# Altium PCB LED Controller.PcbDoc (part 1 of 2)
Units mm, origin at the board's own origin, x right, y up, seen from the top; angles counter-clockwise.
Board outline 41 x 37 mm, 2 copper layers (Top Layer, Bottom Layer), stack 1.62 mm thick; 53 components, 38 nets, 220 pads, 86 vias.
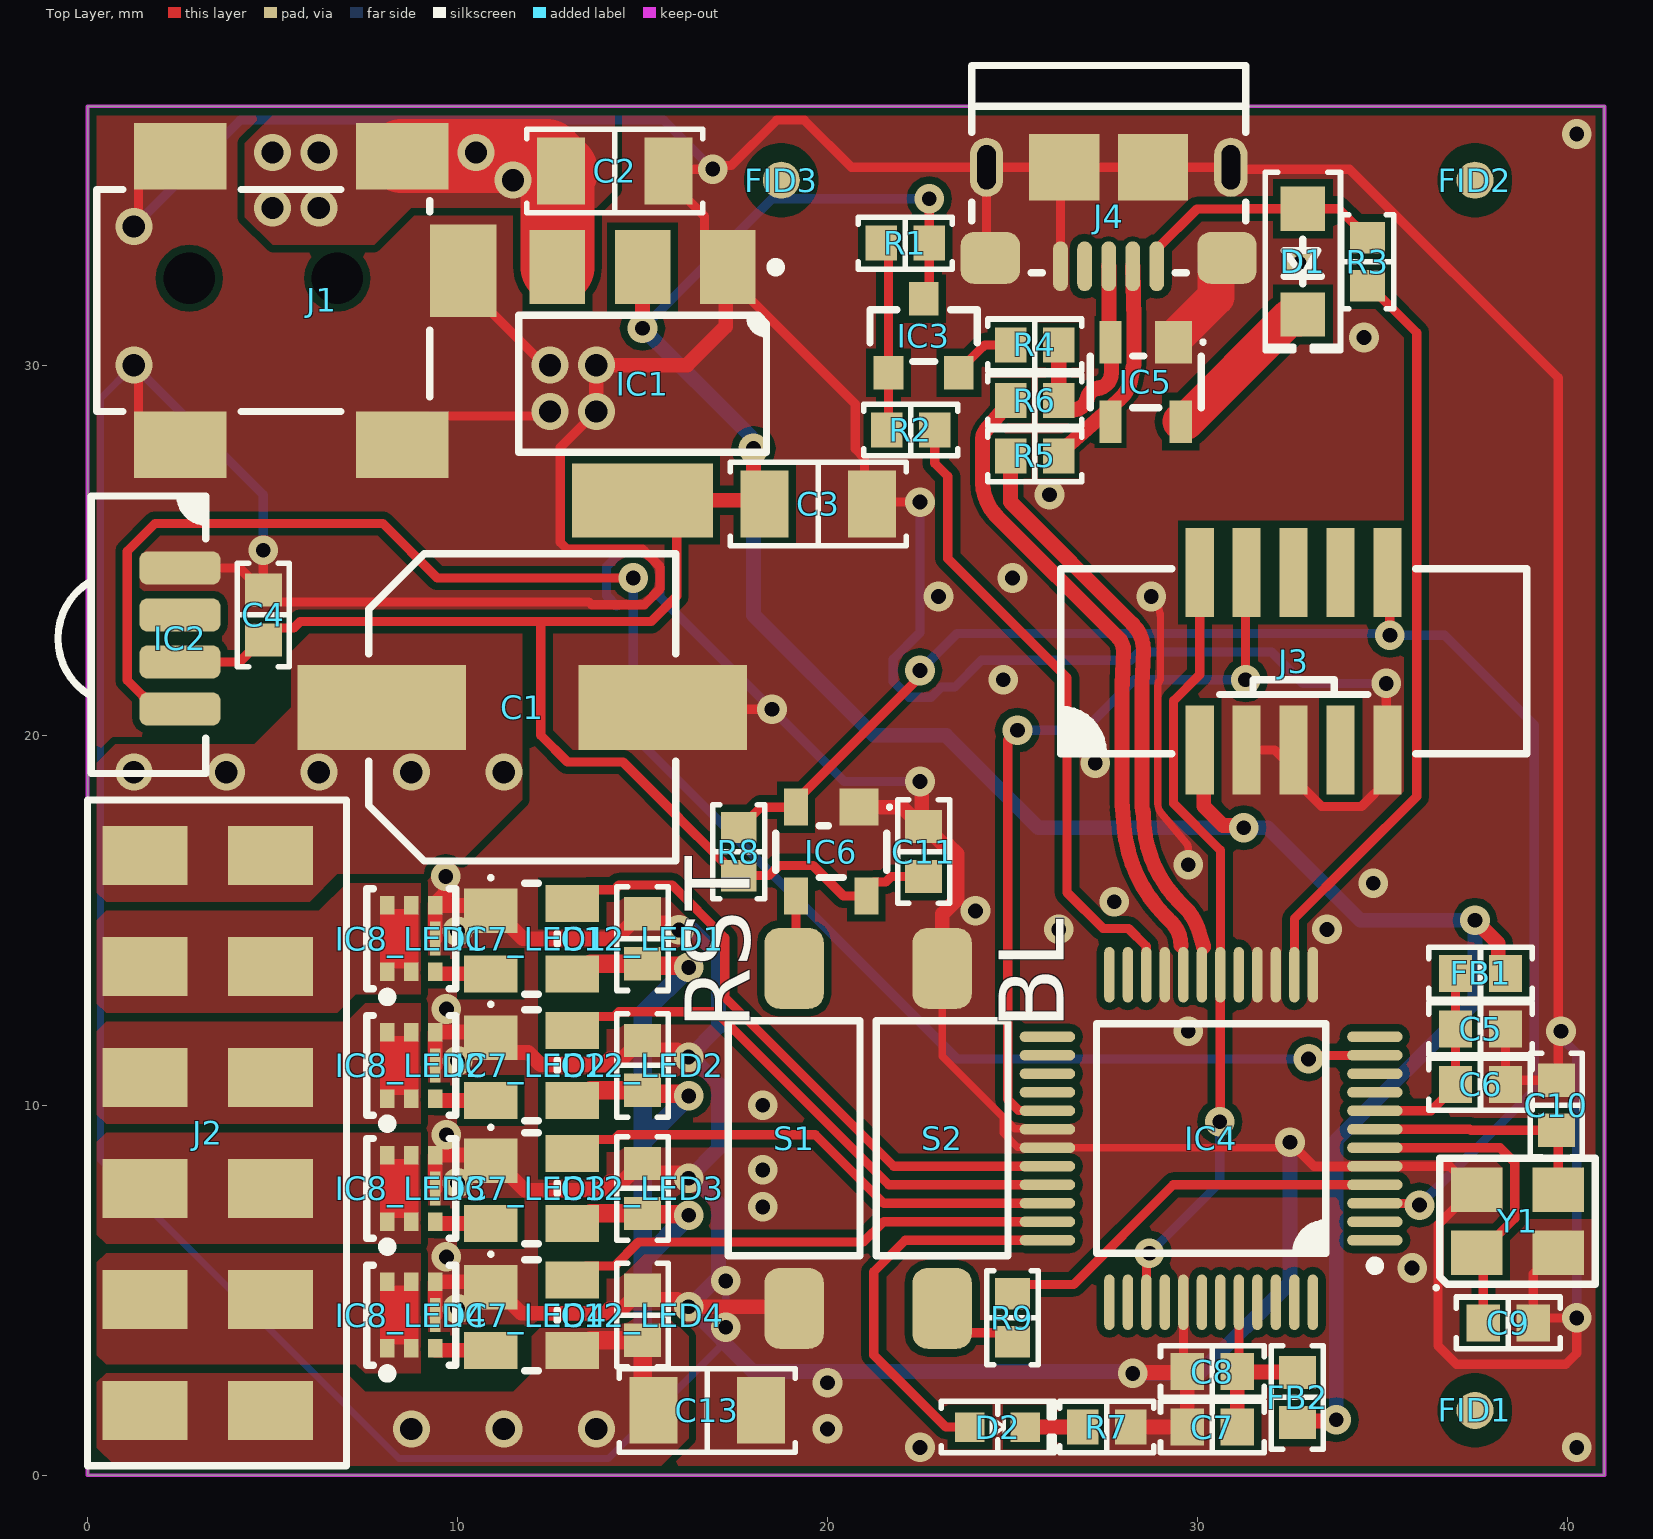
[diagram p0: Top Layer view]
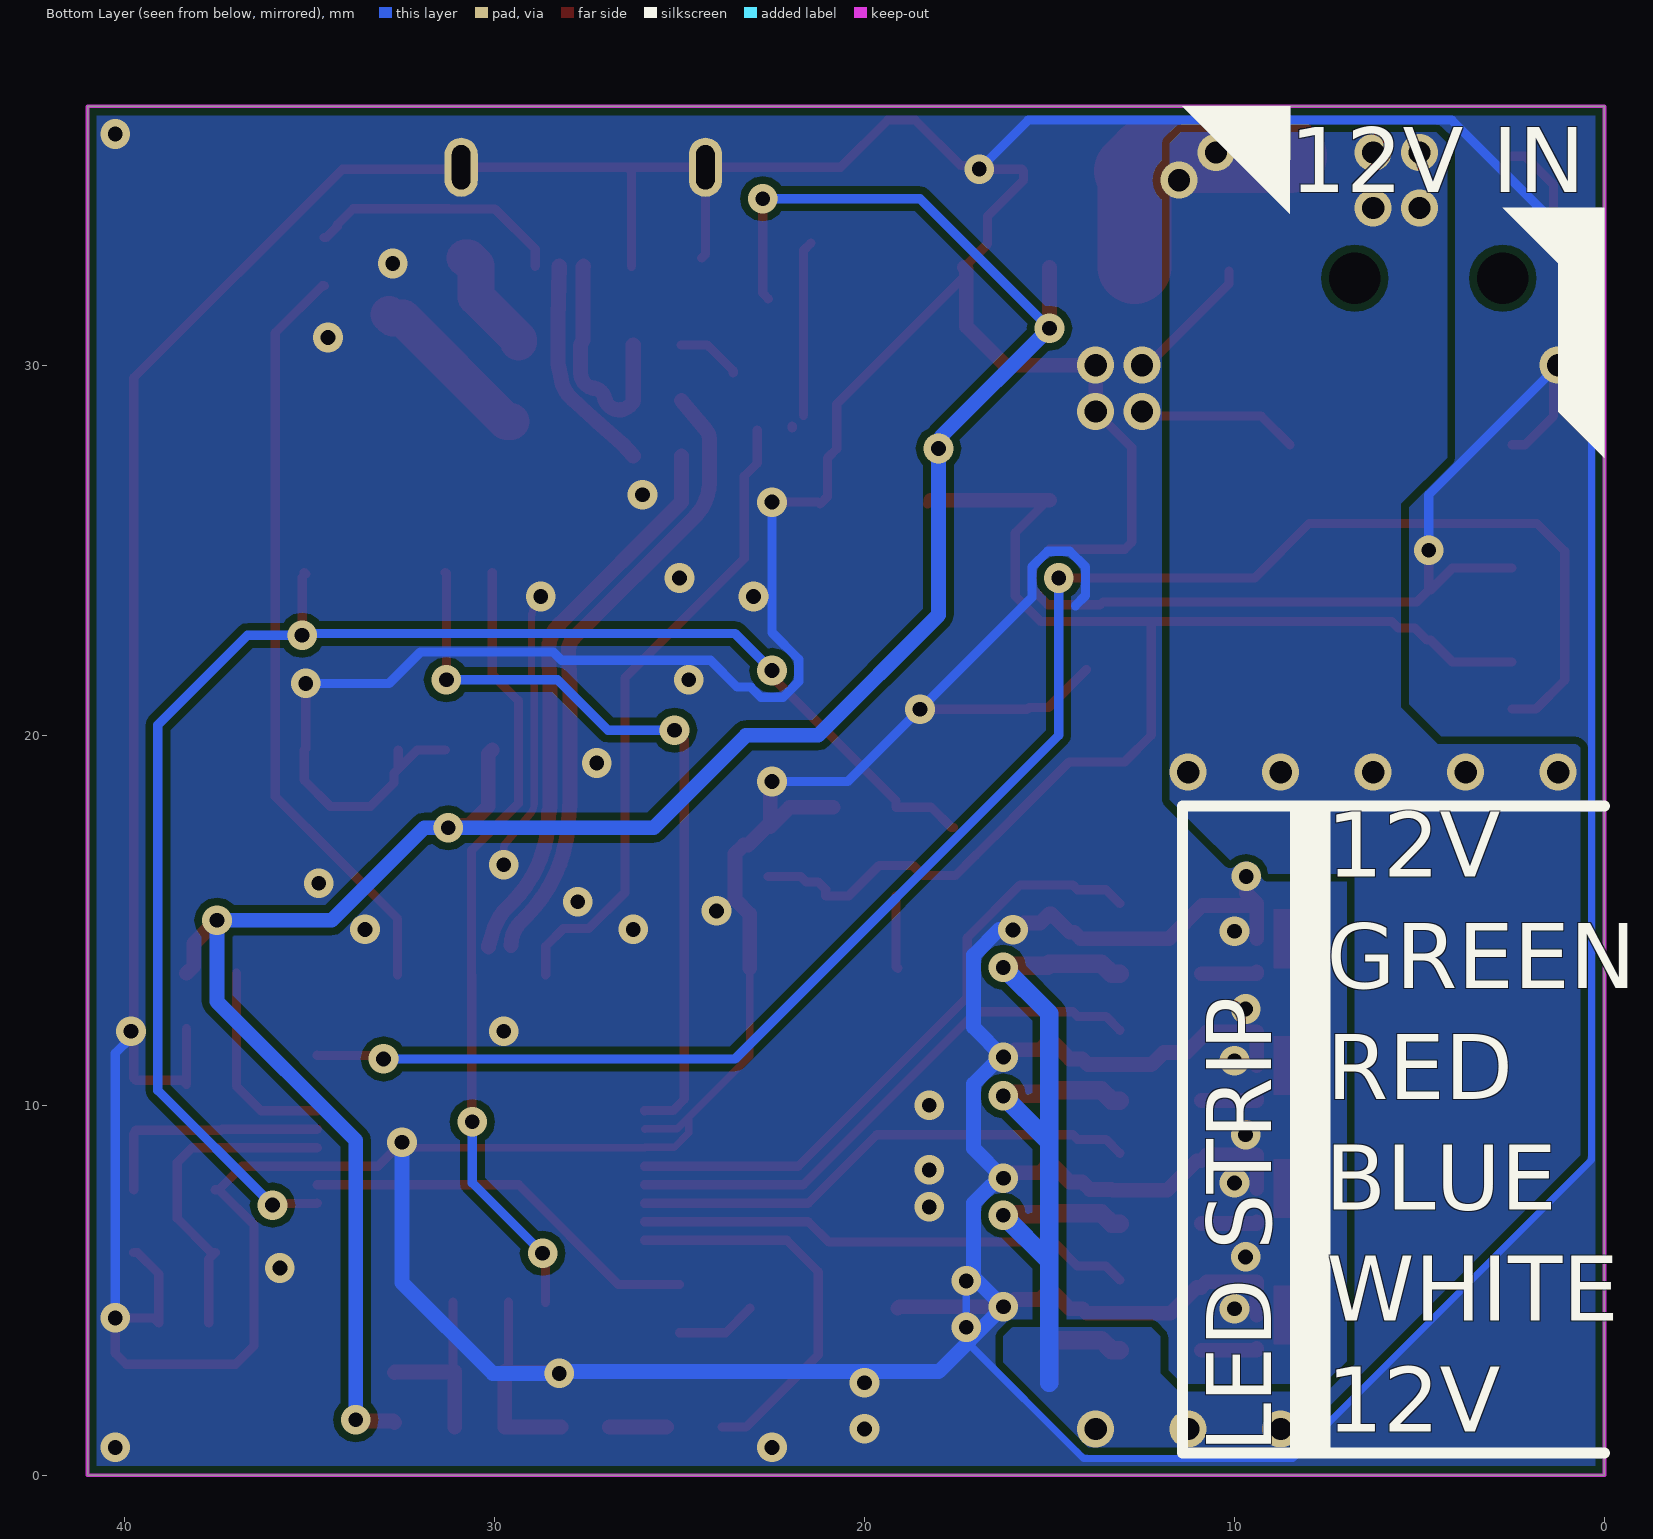
[diagram p1: Bottom Layer view, seen from below]
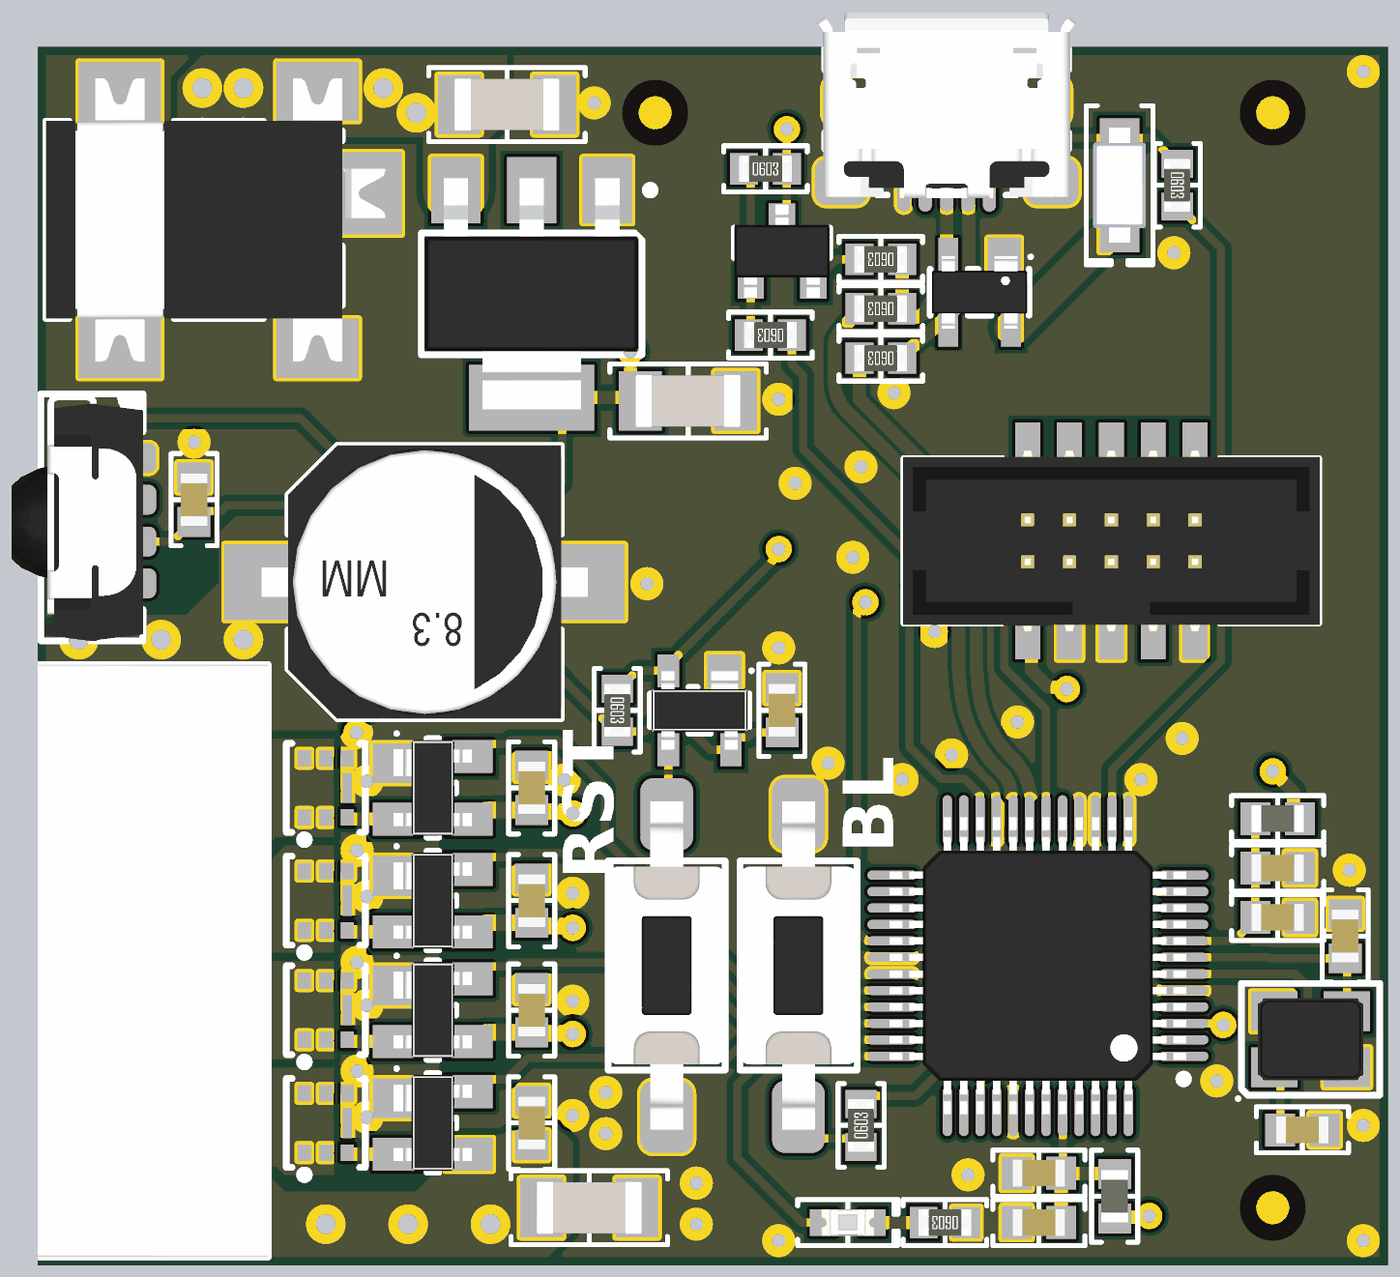
[diagram p2: 3D render of the assembled board from above, using the file's embedded part models]

## Layer stack, top to bottom
Top Solder: solder mask 0.0102, Solder Resist, Dk 3.5
Top Layer: signal copper 0.035
Dielectric1: core 1.55, FR-4, Dk 4.8
Bottom Layer: signal copper 0.035
Bottom Solder: solder mask 0.0102, Solder Resist, Dk 3.5

## Board outline
0,0 0,37 41,37 41,0

## Design rules (kind name [scope] priority, off if disabled: settings)
Clearance "USB Clearance" [(InDifferentialPairClass('All Differential Pairs'))] p1: gap=0.127 ignorepadtopadclearanceinfootprint=FALSE
Clearance PadClearance [IsPad vs IsPad] p2: gap=0.15 ignorepadtopadclearanceinfootprint=FALSE
Clearance [All] p3: gap=0.2 ignorepadtopadclearanceinfootprint=FALSE except(0: Arc-Hole Track-Hole SMDPad-Hole THPad-Hole Via-Hole Fill-Hole Poly-Hole Region-Hole Text-Hole)
DiffPairsRouting [InDifferentialPairClass('USBD')] p1: maxlimit=0.13 minlimit=0.127 mostfreqgap=0.13 toplayer_minwidth=0.407 toplayer_maxwidth=0.422 toplayer_prefwidth=0.422 bottomlayer_minwidth=0.407 bottomlayer_maxwidth=0.422 bottomlayer_prefwidth=0.422 impedanceprofiledriven=TRUE impedanceprofileid={11A85DAD-2FEE-479E-89B3-22AE164754FC} impedanceprofilevalue=90.000000 maxuncoupledlength=12.7
HoleSize [All] p1: absolutevalues=TRUE maxlimit=6 minlimit=0.4 maxpercent=80.000 minpercent=20.000
HoleToHoleClearance [All] p1: gap=0.2 allowstackedmicrovias=TRUE
MinimumSolderMaskSliver [All] p1: minsoldermaskwidth=0
PolygonConnect ViaConnect [IsVia] p1: connectstyle=Direct reliefconductorwidth=0.254 reliefentries=4 polygonreliefangle="90 Angle" airgapwidth=0.254
PolygonConnect [All] p2: connectstyle=Direct reliefconductorwidth=0.3 reliefentries=4 polygonreliefangle="90 Angle" airgapwidth=0.254
RoomDefinition U_Microcontroller [InComponentClass('U_Microcontroller')] p1: confinementstyle=ConfineIn formatcopy=TRUE lockcomponents=FALSE outline -1.8,-0.1 41.4,-0.1 41.4,39.5 -1.8,39.5
RoomDefinition LED2 [InComponentClass('LED2')] p2: confinementstyle=ConfineIn formatcopy=TRUE lockcomponents=FALSE outline 6.5,8.075 16.75,8.075 16.75,13.825 6.5,13.825
RoomDefinition LED3 [InComponentClass('LED3')] p3: confinementstyle=ConfineIn formatcopy=TRUE lockcomponents=FALSE outline 6.5,4.75 16.75,4.75 16.75,10.5 6.5,10.5
RoomDefinition LED4 [InComponentClass('LED4')] p4: confinementstyle=ConfineIn formatcopy=TRUE lockcomponents=FALSE outline 6.5,1.325 16.75,1.325 16.75,7.075 6.5,7.075
RoomDefinition Top [InComponentClass('Top')] p5: confinementstyle=ConfineIn formatcopy=TRUE lockcomponents=FALSE outline -1.75,-0.1 41.5,-0.1 41.5,39.4 -1.75,39.4
RoomDefinition LED1 [InComponentClass('LED1')] p6: confinementstyle=ConfineIn formatcopy=TRUE lockcomponents=FALSE outline 6.5,11.5 16.75,11.5 16.75,17.25 6.5,17.25
RoutingVias [All] p1: holewidth=0.6 width=1 viastyle="Through Hole" minholewidth=0.4 minwidth=0.8 maxholewidth=5 maxwidth=6
SilkToSilkClearance [All] p1: silktosilkclearance=0
SilkToSolderMaskClearance SilkscreenOverComponentPads [IsPad] p1: minsilkscreentomaskgap=0.05 clearancetoexposedcopper=TRUE
SolderMaskExpansion "Via Tenting" [IsVia] p1: expansion=-2 istentingtop=FALSE
SolderMaskExpansion [All] p2: expansion=0.102 istentingtop=FALSE
Width [All] p1: maxlimit=2 minlimit=0.2 preferedwidth=0.4
24 further rules are at their usual default settings.

## Classes and differential pairs
differential pair class USBD: USB_IN_D USBD
channel class LedChannel: LED1 LED2 LED3 LED4
net class LED_OUT[1..4]: LED_OUT1 LED_OUT2 LED_OUT3 LED_OUT4
net class LED_CTL[1..4]: LED_CTL1 LED_CTL2 LED_CTL3 LED_CTL4
component class U_Microcontroller: C5 C6 C7 C8 C9 C10 C11 D1 D2 FB1 FB2 IC3 IC4 IC5 IC6 J3 J4 R1 R2 R3 R4 R5 R6 R7 R8 R9 S1 S2 Y1
component class Top: C1 C2 C3 C4 C13 FID1 FID2 FID3 IC1 IC2 J1 J2
component class LED4: C12_LED4 IC7_LED4 IC8_LED4
component class LED3: C12_LED3 IC7_LED3 IC8_LED3
component class LED2: C12_LED2 IC7_LED2 IC8_LED2
component class LED1: C12_LED1 IC7_LED1 IC8_LED1
differential pair USBD: +USBD_P -USBD_N
differential pair USB_IN_D: +USB_IN_D_P -USB_IN_D_N

## Components (designator, comment, footprint, x,y, rotation, side; value= is the part's Value field where it differs from the comment)
C1 "220µF" "CAP ALSMD 8.3MM H10.5MM" 11.75,20.75 r0 top
C2 "10µF" "CAP 1206_3216 - 1.8MM" 14.25,35.25 r180 top
C3 "10µF" "CAP 1206_3216 - 1.8MM" 19.75,26.25 r180 top
C4 "0.1µF" "CAP 0603_1608" 4.75,23.25 r270 top
C5 "0.1µF" "CAP 0603_1608" 37.65,12.065 r180 top
C6 "10000pF" "CAP 0603_1608" 37.65,10.565 r180 top
C7 "0.1µF" "CAP 0603_1608" 30.4,1.3 r0 top
C8 "10000pF" "CAP 0603_1608" 30.4,2.8 r0 top
C9 "18pF" "CAP 0603_1608" 38.4,4.115 r180 top
C10 "18pF" "CAP 0603_1608" 39.7,10 r270 top
C11 "0.1µF" "CAP 0603_1608" 22.6,16.855 r270 top
C12_LED1 "1µF" "CAP 0603_1608" 15,14.5 r270 top (schematic designator C12)
C12_LED2 "1µF" "CAP 0603_1608" 15,11.075 r270 top (schematic designator C12)
C12_LED3 "1µF" "CAP 0603_1608" 15,7.75 r270 top (schematic designator C12)
C12_LED4 "1µF" "CAP 0603_1608" 15,4.325 r270 top (schematic designator C12)
C13 "47µF" "CAP 1206_3216 - 1.8MM" 16.75,1.75 r180 top
D1 "NRVB120VLSFT1G" SOD123F 32.85,32.8 r270 top
D2 "Green" "LED 0603_1608 GREEN" 24.6,1.3 r0 top
FB1 "1 kOhms @ 100MHz" "FER 0603_1608" 37.65,13.565 r0 top
FB2 "1 kOhms @ 100MHz" "FER 0603_1608" 32.7,2.1 r270 top
FID1 "Fiducial" Fiducial-1mm 37.5,1.75 r90 top
FID2 "Fiducial" Fiducial-1mm 37.5,35 r90 top
FID3 "Fiducial" Fiducial-1mm 18.75,35 r90 top
IC1 "NCP1117LPST33T3G" "ON SEMI SOT-223 ST(318H)" 15,29.5 r270 top
IC2 "TSOP36138TR" "VISHAY TSOP36X-TR" 2.5,22.615 r270 top
IC3 "DMG2305UX-13" "DIODES SOT-23-3" 22.6,30.8 r90 top
IC4 "LPC11U36FBD48/401," "NXP LQFP-48 7X7MM" 30.369,9.1 r180 top
IC5 "PRTR5V0U2X,215" SOT143B 28.6,29.55 r270 top
IC6 "STM6315SDW13F" "ST SOT-143-4" 20.1,16.855 r270 top
IC7_LED1 "MIC4416YM4-TR" "MICROCHIP SOT-143-4" 12,14.5 r0 top (schematic designator IC7)
IC7_LED2 "MIC4416YM4-TR" "MICROCHIP SOT-143-4" 12,11.075 r0 top (schematic designator IC7)
IC7_LED3 "MIC4416YM4-TR" "MICROCHIP SOT-143-4" 12,7.75 r0 top (schematic designator IC7)
IC7_LED4 "MIC4416YM4-TR" "MICROCHIP SOT-143-4" 12,4.325 r0 top (schematic designator IC7)
IC8_LED1 "DMN3016LFDE-13" "DIODES U-DFN2020-6E" 8.75,14.5 r90 top (schematic designator IC8)
IC8_LED2 "DMN3016LFDE-13" "DIODES U-DFN2020-6E" 8.75,11.075 r90 top (schematic designator IC8)
IC8_LED3 "DMN3016LFDE-13" "DIODES U-DFN2020-6E" 8.75,7.75 r90 top (schematic designator IC8)
IC8_LED4 "DMN3016LFDE-13" "DIODES U-DFN2020-6E" 8.75,4.325 r90 top (schematic designator IC8)
J1 "PJ-075CH-SMT-TR" "CUI PJ-075-SMT" 4.75,31.75 r0 top
J2 "009296006202906" "AVX 9296006202806" 3.5,9.25 r270 top
J3 "3221-10-0300-00" "CNC TECH 3221-10-0300-00" 32.6,22 r90 top
J4 "10118193-0001LF" "FCI USB 10118193-0001LF" 27.6,35.3 r0 top
R1 "24 kOhms" "RES 0603_1608" 22.1,33.3 r0 top
R2 "2 kOhms" "RES 0603_1608" 22.25,28.25 r180 top
R3 "2 kOhms" "RES 0603_1608" 34.6,32.8 r270 top
R4 "1.5 kOhms" "RES 0603_1608" 25.6,30.55 r180 top
R5 "33 Ohms" "RES 0603_1608" 25.6,27.55 r180 top
R6 "33 Ohms" "RES 0603_1608" 25.6,29.05 r180 top
R7 "1.5 kOhms" "RES 0603_1608" 27.55,1.3 r180 top
R8 "10 kOhms" "RES 0603_1608" 17.6,16.855 r270 top
R9 "2 kOhms" "RES 0603_1608" 25,4.25 r90 top
S1 "FSMSMTR" "TE FSMSMTR" 19.1,9.105 r0 top
S2 "FSMSMTR" "TE FSMSMTR" 23.1,9.105 r0 top
Y1 "12MHz" "ABRACON ABM8G" 38.65,6.865 r0 top

## Footprints (in the part's own frame and the unit in brackets; to place one, negate y for a bottom-side part, rotate by r counter-clockwise, add the part's x,y. Pads: shape width x height; smd on the part's side, far side on the other; paste and mask are expansions set on the pad)
"ABRACON ABM8G" [mm] "Crystal, 4-Leads, Body 2.50x3.20mm, Pitch 2.20mm, IPC Medium Density"
  rect 1.4x1.2 smd: 1(-1.1,-0.85) 2(1.1,-0.85) 3(1.1,0.85) 4(-1.1,0.85)
  silkscreen extent -2.25,-1.85 2.1,1.7, body extent -1.61,-1.26 1.61,1.26, height 0.6
"AVX 9296006202806" [mm] "POKE-HOME: LOW PROFILE HORIZONTAL"
  rect 1.6x2.3 smd: 1(-7.5,-1.95) 1(-7.5,1.45) 2(-4.5,-1.95) 2(-4.5,1.45) 3(-1.5,1.45) 3(-1.5,-1.95) 4(1.5,1.45) 4(1.5,-1.95) 5(4.5,-1.95) 5(4.5,1.45) 6(7.5,-1.95) 6(7.5,1.45)
  silkscreen extent -9,-3.5 9,3.5, body extent -9,-3.5 9,3.5, height 2.55
"CAP 0603_1608" [mm] "Chip Capacitor, 2-Leads, Body 1.60x0.80mm, IPC Medium Density"
  rect 0.9x1 smd: 1(-0.675,0) 2(0.675,0)
  silkscreen extent -1.4,-0.7 1.4,0.7, body extent -0.8,-0.41 0.8,0.41, height 0.82
"CAP 1206_3216 - 1.8MM" [mm] "Chip Capacitor, 2-Leads, Body 3.25x1.60mm, IPC Medium Density"
  rect 1.3x1.8 smd: 1(-1.45,0) 2(1.45,0)
  silkscreen extent -2.37,-1.12 2.37,1.12, body extent -1.6,-0.8 1.6,0.8, height 1.8
"CAP ALSMD 8.3MM H10.5MM" [mm] "Aluminum Electrolytic Capacitor, Body 8.30x8.30x10.50mm, IPC Low Density"
  rect 4.55x2.3 smd: 1(-3.8,0) 2(3.8,0)
  silkscreen extent -4.15,-4.15 4.15,4.15, body extent -4.95,-4.15 4.95,4.15, height 10.5
"CNC TECH 3221-10-0300-00" [mm]
  rect 2.4x0.76 smd: 1(-2.4,2.54) 2(-2.4,1.27) 3(-2.4,0) 4(-2.4,-1.27) 5(-2.4,-2.54) 6(2.4,-2.54) 7(2.4,-1.27) 8(2.4,0) 9(2.4,1.27) 10(2.4,2.54)
  silkscreen extent -2.5,-6.3 2.5,6.3, body extent -2.75,-6.32 2.75,6.33, height 5.6
"CUI PJ-075-SMT" [mm]
  rect 2.5x1.8 smd: 1(3.75,3.9) 2(-2.25,-3.9) 2(-2.25,3.9) 2(3.75,-3.9)
  rect 1.8x2.5 smd: 3(5.4,0.8)
  round 0 hole 1.4 unplated: M(-2,0.6) M(2,0.6)
  silkscreen extent -4.5,-3 4.5,3, body extent -4.5,-4.3 5.8,4.3, height 4.8
"DIODES SOT-23-3" [mm] "SOT23, 3-Leads, Body 2.90x2.40mm, Pitch 0.95mm, IPC Medium Density"
  rect 0.9x0.8 smd: 1(-1,0.95) 2(-1,-0.95) 3(1,0)
  silkscreen extent -0.7,-1.45 0.7,1.45, body extent -1.41,-1.45 1.41,1.45, height 1.5
"DIODES U-DFN2020-6E" [mm] "U-DFN2020-6(E), 6-Leads, Body 2.00x2.00mm, Pitch 0.65mm, Thermal Pad 1.05x2.3mm, IPC High Density"
  rect 0.5x0.4 smd: D(-0.9,0) D(-0.9,0.65) D(0.9,0) D(0.9,0.65) G(-0.9,-0.65) S(0.9,-0.65)
  rect 0.92x0.285 smd: S(0,-0.65)
  Top Layer region: -0.8,-0.2 0.8,-0.2 0.8,0.85 -0.8,0.85
  silkscreen extent -1.7,-1.2 1.35,1.2, body extent -1,-1 1,1, height 0.63
"FCI USB 10118193-0001LF" [mm] "USB 2.0 Type B Micro"
  oval 0.4x1.35 smd: 1(1.3,-2.625) 2(0.65,-2.625) 3(0,-2.625) 4(-0.65,-2.625) 5(-1.3,-2.625)
  oval 0.9x1.6 hole 0.5 slot 1.2 at 90 deg: S(-3.3,0.05) S(3.3,0.05)
  rrect50% 1.6x1.4 smd: S(-3.2,-2.4) S(3.2,-2.4)
  rect 1.9x1.8 smd: S(-1.2,0.05) S(1.2,0.05)
  silkscreen extent -3.7,-2.8 3.7,2.8, body extent -3.93,-2.9 3.93,2.76, height 2.78
"FER 0603_1608" [mm] "Chip Ferrite, 2-Leads, Body 1.60x0.80mm, IPC Medium Density"
  rect 0.9x1 smd: 1(-0.675,0) 2(0.675,0)
  silkscreen extent -1.4,-0.7 1.4,0.7, body extent -0.8,-0.41 0.8,0.41, height 0.82
Fiducial-1mm [mm]
  round 1 smd paste-1 mask+0.5: F(0,0)
  Top Layer pour cut-out: 0,0
  Top Layer pour cut-out: -1,0 -0.924,0.383 -0.707,0.707 -0.383,0.924 0,1 0,1 0.383,0.924 0.707,0.707 0.924,0.383 1,0 1,0 0.924,-0.383 0.707,-0.707 0.383,-0.924 0,-1 0,-1 -0.383,-0.924 -0.707,-0.707 -0.924,-0.383 -1,0
"LED 0603_1608 GREEN" [mm] "Chip Diode, 2-Leads, Body 1.60x0.80mm, IPC Medium Density"
  rect 0.8x0.8 smd: 1(-0.75,0) 2(0.75,0)
  silkscreen extent -1.52,-0.7 1.52,0.7, body extent -0.8,-0.4 0.8,0.4, height 0.53
"MICROCHIP SOT-143-4" [mm] "SOT143, 4-Leads, Body 2.92x2.37mm, Pitch 1.90mm, IPC Medium Density"
  rect 1.44x1.2 smd: 1(-1.1,0.75)
  rect 1.44x1 smd: 2(-1.1,-0.95) 3(1.1,-0.95) 4(1.1,0.95)
  silkscreen extent -1.15,-1.5 0.7,1.7, body extent -1.19,-1.46 1.19,1.46, height 1.05
"NXP LQFP-48 7X7MM" [mm] "LQFP, 48-Leads, Body 7.00x7.00mm, Pitch 0.50mm, IPC Medium Density"
  oval 1.5x0.28 smd: 1(-4.425,2.75) 2(-4.425,2.25) 3(-4.425,1.75) 4(-4.425,1.25) 5(-4.425,0.75) 6(-4.425,0.25) 7(-4.425,-0.25) 8(-4.425,-0.75) 9(-4.425,-1.25) 10(-4.425,-1.75) 11(-4.425,-2.25) 12(-4.425,-2.75) 25(4.425,-2.75) 26(4.425,-2.25) 27(4.425,-1.75) 28(4.425,-1.25) 29(4.425,-0.75) 30(4.425,-0.25) 31(4.425,0.25) 32(4.425,0.75) 33(4.425,1.25) 34(4.425,1.75) 35(4.425,2.25) 36(4.425,2.75)
  oval 0.28x1.5 smd: 13(-2.75,-4.425) 14(-2.25,-4.425) 15(-1.75,-4.425) 16(-1.25,-4.425) 17(-0.75,-4.425) 18(-0.25,-4.425) 19(0.25,-4.425) 20(0.75,-4.425) 21(1.25,-4.425) 22(1.75,-4.425) 23(2.25,-4.425) 24(2.75,-4.425) 37(2.75,4.425) 38(2.25,4.425) 39(1.75,4.425) 40(1.25,4.425) 41(0.75,4.425) 42(0.25,4.425) 43(-0.25,4.425) 44(-0.75,4.425) 45(-1.25,4.425) 46(-1.75,4.425) 47(-2.25,4.425) 48(-2.75,4.425)
  silkscreen extent -4.55,-3.1 3.1,3.56, body extent -4.51,-4.51 4.51,4.51, height 1.55
"ON SEMI SOT-223 ST(318H)" [mm] "SOT223, 4-Leads, Body 6.50x7.00mm (avg), Pitch 2.30mm, IPC Medium Density"
  rect 2x1.5 smd: 1(-3.15,2.3) 2(-3.15,0) 3(-3.15,-2.3)
  rect 2x3.8 smd: 4(3.15,0)
  silkscreen extent -3.27,-3.35 1.85,3.73, body extent -3.52,-3.25 3.5,3.25, height 1.8
"RES 0603_1608" [mm] "Chip Resistor, 2-Leads, Body 1.60x0.80mm, IPC Medium Density"
  rect 0.85x0.95 smd: 1(-0.65,0) 2(0.65,0)
  silkscreen extent -1.27,-0.7 1.27,0.7, body extent -0.8,-0.4 0.8,0.4, height 0.45
SOD123F [mm] "SODFL, 2-Leads, Body 1.60x3.50mm, IPC Medium Density"
  rect 1.2x1.2 smd: 1(-1.43,0) 2(1.43,0)
  silkscreen extent -2.41,-1.02 2.41,1.02, body extent -1.75,-0.8 1.75,0.8, height 1.1
SOT143B [mm] "SOT143, 4-Leads, Body 2.90x2.30mm, Pitch 1.90mm, IPC Medium Density"
  rect 1.15x1 smd: 1(-1.075,0.75)
  rect 1.15x0.6 smd: 2(-1.075,-0.95) 3(1.075,-0.95) 4(1.075,0.95)
  silkscreen extent -1.12,-1.5 0.7,1.6, body extent -1.1,-1.45 1.1,1.45, height 1
"ST SOT-143-4" [mm] "SOT143, 4-Leads, Body 2.92x2.37mm, Pitch 1.90mm, IPC Medium Density"
  rect 1x1.05 smd: 1(-1.2,0.75)
  rect 1x0.65 smd: 2(-1.2,-0.95) 3(1.2,-0.95) 4(1.2,0.95)
  silkscreen extent -1.25,-1.5 0.7,1.63, body extent -1.19,-1.46 1.19,1.46, height 1.05
"TE FSMSMTR" [mm]
  rrect50% 1.6x2.19 smd: 1(0,4.595) 2(0,-4.595)
  silkscreen extent -1.78,-3.17 1.78,3.17, body extent -1.75,-4.98 1.75,4.98, height 4.42
"VISHAY TSOP36X-TR" [mm]
  rrect50% 0.9x2.2 smd: 1(-1.905,0) 2(-0.635,0) 3(0.635,0) 4(1.905,0)
  silkscreen extent -3.85,-3.3 3.65,0.7, body extent -3.85,-3.3 3.65,0.7, height 5.3

## Part data
C1: library part UUX1E221MNL6GS, "CAP ALUM 220UF 20% 25V SMD", Device Package="Radial, Can - SMD", Lifetime @ Temp.="2000 Hrs @ 105°C", Manufacturer=Nichicon, Operating Temperature="-55°C ~ 105°C", Ripple Current @ High Frequency="367.9mA @ 10kHz", Ripple Current @ Low Frequency="283mA @ 120Hz", Supplier Part Number 1=493-9620-1-ND, Tolerance=±20%, Voltage - Rated=25V, Applications="General Purpose", Capacitance=220µF, ComponentLink1Description=Datasheet, ComponentLink1URL=http://nichicon-us.com/english/products/pdfs/e-uux.pdf, ComponentLink2Description="DigiKey Link", ComponentLink2URL=http://digikey.com/product-detail/en/nichicon/UUX1E221MNL6GS/493-9620-1-ND/3962952, Height - Seated (Max)="0.413\" (10.50mm)", LastUpdated="21/01/2020 04:02:43", Lifecycle Status=Active, Minimum Order=1, Mounting Type="Surface Mount", Package / Case="Radial, Can - SMD", Packaging=TapeAndReel, Part Number=UUX1E221MNL6GS, Part Status=Active, PartId=7707, Polarization=Polar, Price=0.16, Series=UUX, Size / Dimension="0.315\" Dia (8.00mm)", Supplier 1=DigiKey, Surface Mount Land Size="0.327\" L x 0.327\" W (8.30mm x 8.30mm)"
C2 C3: library part CL31A106KAHNNNE, "CAP CER 10UF 25V X5R 1206", Device Package="1206 (3216 Metric)", Manufacturer="Samsung Electro-Mechanics", Operating Temperature="-55°C ~ 85°C", Supplier Part Number 1=1276-1075-1-ND, Temperature Coefficient=X5R, Tolerance=±10%, Voltage - Rated=25V, Applications="General Purpose", Capacitance=10µF, ComponentLink1Description=Datasheet, ComponentLink1URL=http://www.samsungsem.com/kr/support/product-search/mlcc/CL31A106KAHNNNE.jsp, ComponentLink2Description="DigiKey Link", ComponentLink2URL=http://digikey.com/product-detail/en/samsung-electro-mechanics/CL31A106KAHNNNE/1276-1075-1-ND/3889161, LastUpdated="21/01/2020 00:03:42", Lifecycle Status=Active, Minimum Order=1, Mounting Type="Surface Mount, MLCC", Package / Case="1206 (3216 Metric)", Packaging=TapeAndReel, Part Number=CL31A106KAHNNNE, Part Status=Active, PartId=21774, Price=0.04, Series=CL, Size / Dimension="0.126\" L x 0.063\" W (3.20mm x 1.60mm)", Supplier 1=DigiKey, Thickness (Max)="0.071\" (1.80mm)"
C4 C5 C7 C11: library part CS0603KRX7R7BB104, "CAP CER 0.1UF 16V X7R 0603", Device Package="0603 (1608 Metric)", Manufacturer=Yageo, Operating Temperature="-55°C ~ 125°C", Supplier Part Number 1=311-3560-1-ND, Temperature Coefficient=X7R, Tolerance=±10%, Voltage - Rated=16V, Applications="Boardflex Sensitive", Capacitance=0.1µF, ComponentLink1Description=Datasheet, ComponentLink1URL=http://www.yageo.com/NewPortal/yageodocoutput?fileName=/pdf/MLCC/UPY-ST_NPOX7R_16V-to-3KV_5.pdf, ComponentLink2Description="DigiKey Link", ComponentLink2URL=http://digikey.com/product-detail/en/yageo/CS0603KRX7R7BB104/311-3560-1-ND/7648487, Features="Soft Termination", LastUpdated="02/01/2020 00:02:08", Lifecycle Status=Active, Minimum Order=1, Mounting Type="Surface Mount, MLCC", Package / Case="0603 (1608 Metric)", Packaging=ReReel, Part Number=CS0603KRX7R7BB104, Part Status=Active, PartId=2286, Price=0.00, Series=CS, Size / Dimension="0.063\" L x 0.031\" W (1.60mm x 0.80mm)", Supplier 1=DigiKey, Thickness (Max)="0.037\" (0.95mm)"
C6 C8: library part AC0603KPX7R9BB103, "CAP CER 10000PF 50V X7R 0603", Device Package="0603 (1608 Metric)", Manufacturer=Yageo, Operating Temperature="-55°C ~ 125°C", Ratings=AEC-Q200, Supplier Part Number 1=311-3284-1-ND, Temperature Coefficient=X7R, Tolerance=±10%, Voltage - Rated=50V, Applications=Automotive, Capacitance=10000pF, ComponentLink1Description=Datasheet, ComponentLink1URL=http://www.yageo.com/NewPortal/_en/search/productDocs.jsp?YageoPartNumber=AC0603KPX7R9BB103, ComponentLink2Description="DigiKey Link", ComponentLink2URL=http://digikey.com/product-detail/en/yageo/AC0603KPX7R9BB103/311-3284-1-ND/6643536, LastUpdated="21/01/2020 00:02:05", Lifecycle Status=Active, Minimum Order=1, Mounting Type="Surface Mount, MLCC", Package / Case="0603 (1608 Metric)", Packaging=TapeAndReel, Part Number=AC0603KPX7R9BB103, Part Status=Active, PartId=5188, Price=0.01, Series=AC, Size / Dimension="0.063\" L x 0.031\" W (1.60mm x 0.80mm)", Supplier 1=DigiKey, Thickness (Max)="0.035\" (0.90mm)"
C9 C10: library part C0603C180K5GACTU, "CAP CER 18PF 50V C0G/NP0 0603", Device Package="0603 (1608 Metric)", Manufacturer=KEMET, Operating Temperature="-55°C ~ 125°C", Supplier Part Number 1=399-7866-1-ND, Temperature Coefficient="C0G, NP0", Tolerance=±10%, Voltage - Rated=50V, Applications="General Purpose", Capacitance=18pF, ComponentLink1Description=Datasheet, ComponentLink1URL=https://api.kemet.com/component-edge/download/datasheet/C0603C180K5GACTU.pdf, ComponentLink2Description="DigiKey Link", ComponentLink2URL=http://digikey.com/product-detail/en/kemet/C0603C180K5GACTU/399-7866-1-ND/3471589, Features="Low ESL", LastUpdated="21/01/2020 00:02:05", Lifecycle Status=Active, Minimum Order=1, Mounting Type="Surface Mount, MLCC", Package / Case="0603 (1608 Metric)", Packaging=TapeAndReel, Part Number=C0603C180K5GACTU, Part Status=Active, PartId=5275, Price=0.01, Series="SMD Comm C0G", Size / Dimension="0.063\" L x 0.031\" W (1.60mm x 0.80mm)", Supplier 1=DigiKey, Thickness (Max)="0.034\" (0.87mm)"
C12_LED1 C12_LED2 C12_LED3 C12_LED4: library part CL10A105KA8NFNC, "CAP CER 1UF 25V X5R 0603", Device Package="0603 (1608 Metric)", Manufacturer="Samsung Electro-Mechanics", Operating Temperature="-55°C ~ 85°C", Supplier Part Number 1=1276-1859-1-ND, Temperature Coefficient=X5R, Tolerance=±10%, Voltage - Rated=25V, Applications="General Purpose", Capacitance=1µF, ComponentLink1Description=Datasheet, ComponentLink1URL=http://www.samsungsem.com/kr/support/product-search/mlcc/CL10A105KA8NFNC.jsp, ComponentLink2Description="DigiKey Link", ComponentLink2URL=http://digikey.com/product-detail/en/samsung-electro-mechanics/CL10A105KA8NFNC/1276-1859-1-ND/3889945, LastUpdated="21/01/2020 00:01:49", Lifecycle Status=Active, Minimum Order=1, Mounting Type="Surface Mount, MLCC", Package / Case="0603 (1608 Metric)", Packaging=TapeAndReel, Part Number=CL10A105KA8NFNC, Part Status=Active, PartId=14268, Price=0.01, Series=CL, Size / Dimension="0.063\" L x 0.031\" W (1.60mm x 0.80mm)", Supplier 1=DigiKey, Thickness (Max)="0.035\" (0.90mm)"
C13: library part GRM31CR61E476ME44L, "CAP CER 47UF 25V X5R 1206", Device Package="1206 (3216 Metric)", Manufacturer="Murata Electronics", Operating Temperature="-55°C ~ 85°C", Supplier Part Number 1=490-16268-1-ND, Temperature Coefficient=X5R, Tolerance=±20%, Voltage - Rated=25V, Applications="General Purpose", Capacitance=47µF, ComponentLink2Description="DigiKey Link", ComponentLink2URL=http://digikey.com/product-detail/en/murata-electronics/GRM31CR61E476ME44L/490-16268-1-ND/7363259, LastUpdated="21/01/2020 00:03:34", Lifecycle Status=Active, Minimum Order=1, Mounting Type="Surface Mount, MLCC", Package / Case="1206 (3216 Metric)", Packaging=TapeAndReel, Part Number=GRM31CR61E476ME44L, Part Status=Active, PartId=22811, Price=0.36, Series=GRM, Size / Dimension="0.126\" L x 0.063\" W (3.20mm x 1.60mm)", Supplier 1=DigiKey, Thickness (Max)="0.071\" (1.80mm)"
D1: "DIODE SCHOTTKY 20V 1A SOD123", Current - Average Rectified (Io)=1A, Current - Reverse Leakage @ Vr="15mA @ 20V", Device Package=SOD-123F, Manufacturer="ON Semiconductor", Operating Temperature - Junction="-65°C ~ 125°C", Supplier Device Package=SOD-123FL, Supplier Part Number 1=NRVB120VLSFT1GOSCT-ND, Voltage - DC Reverse (Vr) (Max)=20V, Voltage - Forward (Vf) (Max) @ If="300mV @ 1A", ComponentLink1Description=Datasheet, ComponentLink1URL=http://www.onsemi.com/pub/Collateral/MBR120VLSFT1-D.PDF, ComponentLink2Description="DigiKey Link", ComponentLink2URL=http://digikey.com/product-detail/en/on-semiconductor/NRVB120VLSFT1G/NRVB120VLSFT1GOSCT-ND/8538727, Diode Type=Schottky, LastUpdated="21/01/2020 02:43:37", Lifecycle Status=Active, Minimum Order=1, Mounting Type="Surface Mount", Package / Case=SOD-123F, Packaging=TapeAndReel, Part Number=NRVB120VLSFT1G, Part Status=Active, PartId=2453, Price=0.15, Series="Automotive, AEC-Q101", Speed="Fast Recovery =< 500ns, > 200mA (Io)", Supplier 1=DigiKey
D2: library part "LG Q396-PS-35", "LED GREEN DIFFUSED 0603 SMD", Current - Test=20mA, Device Package="0603 (1608 Metric)", Lens Color=White, Manufacturer="OSRAM Opto Semiconductors Inc.", Millicandela Rating=163mcd, Supplier Device Package=0603, Supplier Part Number 1=475-3754-1-ND, Voltage - Forward (Vf) (Typ)=2V, Color=Green, ComponentLink1Description=Datasheet, ComponentLink1URL=https://dammedia.osram.info/media/resource/hires/osram-dam-2493948/LG%20Q396.pdf, ComponentLink2Description="DigiKey Link", ComponentLink2URL=http://digikey.com/product-detail/en/osram-opto-semiconductors-inc/LG-Q396-PS-35/475-3754-1-ND/10055035, Configuration=Standard, Height (Max)=0.40mm, LastUpdated="21/01/2020 03:12:08", Lens Size="1.00mm x 0.80mm", Lens Style="Rectangle with Flat Top", Lens Transparency=Diffused, Lifecycle Status=Active, Minimum Order=1, Mounting Type="Surface Mount", Package / Case="0603 (1608 Metric)", Packaging=TapeAndReel, Part Number="LG Q396-PS-35", Part Status=Active, PartId=681, Price=0.05, Series="CHIPLED 0603", Size / Dimension="1.60mm L x 0.80mm W", Supplier 1=DigiKey, Viewing Angle="150°, 120°", Wavelength - Dominant=573nm
FB1 FB2: library part FBTH1608HE102-T, "FERRITE BEAD,HIGH CURRENT, 0603", Current Rating (Max)=500mA, DC Resistance (DCR) (Max)=350mOhm, Device Package="0603 (1608 Metric)", Manufacturer="Taiyo Yuden", Operating Temperature="-40°C ~ 150°C", Ratings=AEC-Q200, Supplier Part Number 1=587-6587-1-ND, ComponentLink1Description=Datasheet, ComponentLink1URL=https://ds.yuden.co.jp/TYCOMPAS/ut/detail?pn=FBTH1608HE102-T&u=M, ComponentLink2Description="DigiKey Link", ComponentLink2URL=http://digikey.com/product-detail/en/taiyo-yuden/FBTH1608HE102-T/587-6587-1-ND/10324935, Filter Type="Power Line", Height (Max)="0.037\" (0.95mm)", Impedance @ Frequency="1 kOhms @ 100MHz", LastUpdated="21/01/2020 02:28:14", Lifecycle Status=Active, Minimum Order=1, Mounting Type="Surface Mount", Number of Lines=1, Package / Case="0603 (1608 Metric)", Packaging=TapeAndReel, Part Number=FBTH1608HE102-T, Part Status=Active, PartId=702, Price=0.09, Series=FB, Size / Dimension="0.063\" L x 0.031\" W (1.60mm x 0.80mm)", Supplier 1=DigiKey
IC1: "IC REG LINEAR 3.3V 1A SOT223", Current - Output=1A, Current - Quiescent (Iq)=700µA, Device Package="TO-261-4, TO-261AA", Manufacturer="ON Semiconductor", Operating Temperature="0°C ~ 125°C", Supplier Device Package=SOT-223, Supplier Part Number 1=NCP1117LPST33T3GOSCT-ND, Voltage - Input (Max)=18V, Voltage - Output (Min/Fixed)=3.3V, Voltage Dropout (Max)="1.4V @ 1A", ComponentLink1Description=Datasheet, ComponentLink1URL=http://www.onsemi.com/pub/Collateral/NCP1117LP-D.PDF, ComponentLink2Description="DigiKey Link", ComponentLink2URL=http://digikey.com/product-detail/en/on-semiconductor/NCP1117LPST33T3G/NCP1117LPST33T3GOSCT-ND/3462387, LastUpdated="21/01/2020 03:56:49", Lifecycle Status=Active, Minimum Order=1, Mounting Type="Surface Mount", Number of Regulators=1, Output Configuration=Positive, Output Type=Fixed, Package / Case="TO-261-4, TO-261AA", Packaging=TapeAndReel, Part Number=NCP1117LPST33T3G, Part Status=Active, Price=0.12, Protection Features="Over Current, Over Temperature", PSRR="60dB (120Hz)", Series=-, Supplier 1=DigiKey
IC2: "SENSOR REMOTE REC 38.0KHZ 45M", B.P.F. Center Frequency=38.0kHz, Current - Supply=350µA, Manufacturer="Vishay Semiconductor Opto Division", Operating Temperature="-25°C ~ 85°C (TA)", Supplier Part Number 1=TSOP36138TRCT-ND, Voltage - Supply="2.5V ~ 5.5V", ComponentLink1Description=Datasheet, ComponentLink1URL=http://www.vishay.com/docs/82567/tsop361.pdf, ComponentLink2Description="DigiKey Link", ComponentLink2URL=http://digikey.com/product-detail/en/vishay-semiconductor-opto-division/TSOP36138TR/TSOP36138TRCT-ND/8556857, LastUpdated="20/04/2020 13:27:50", Lifecycle Status=Active, Minimum Order=1, Mounting Type="Surface Mount", Orientation="Side or Top View", Packaging=TapeAndReel, Part Number=TSOP36138TR, Part Status=Active, Price=0.71, Sensing Distance=45m, Series=-, Supplier 1=DigiKey
IC3: "MOSFET P-CH 20V 4.2A SOT23", Current - Continuous Drain (Id) @ 25°C="4.2A (Ta)", Device Package="TO-236-3, SC-59, SOT-23-3", Drain to Source Voltage (Vdss)=20V, Drive Voltage (Max Rds On,  Min Rds On)="1.8V, 4.5V", Input Capacitance (Ciss) (Max) @ Vds="808pF @ 15V", Manufacturer="Diodes Incorporated", Operating Temperature="-55°C ~ 150°C (TJ)", Power Dissipation (Max)="1.4W (Ta)", Supplier Device Package=SOT-23, Supplier Part Number 1=DMG2305UX-13DICT-ND, ComponentLink1Description=Datasheet, ComponentLink1URL=https://www.diodes.com/assets/Datasheets/DMG2305UX.pdf, ComponentLink2Description="DigiKey Link", ComponentLink2URL=http://digikey.com/product-detail/en/diodes-incorporated/DMG2305UX-13/DMG2305UX-13DICT-ND/4251589, FET Type=P-Channel, Gate Charge (Qg) (Max) @ Vgs="10.2nC @ 4.5V", LastUpdated="21/01/2020 04:00:37", Lifecycle Status=Active, Minimum Order=1, Mounting Type="Surface Mount", Package / Case="TO-236-3, SC-59, SOT-23-3", Packaging=TapeAndReel, Part Number=DMG2305UX-13, Part Status=Active, Price=0.05, Rds On (Max) @ Id, Vgs="52mOhm @ 4.2A, 4.5V", Series=-, Supplier 1=DigiKey, Technology="MOSFET (Metal Oxide)", Vgs (Max)=±8V, Vgs(th) (Max) @ Id="900mV @ 250µA"
IC4: "IC MCU 32BIT 96KB FLASH 48LQFP", Device Package=48-LQFP, Manufacturer="NXP USA Inc.", Operating Temperature="-40°C ~ 85°C (TA)", Supplier Device Package="48-LQFP (7x7)", Supplier Part Number 1=568-9587-ND, Voltage - Supply (Vcc/Vdd)="1.8V ~ 3.6V", ComponentLink1Description=Datasheet, ComponentLink1URL=https://www.nxp.com/docs/en/data-sheet/LPC11U3X.pdf, ComponentLink2Description="DigiKey Link", ComponentLink2URL=//digikey.com/product-detail/en/nxp-usa-inc/LPC11U36FBD48-401/568-9587-ND/3462840, Connectivity="I²C, Microwire, SmartCard, SPI, SSP, UART/USART, USB", Core Processor="ARM® Cortex®-M0", Core Size=32-Bit, Data Converters="A/D 8x10b", EEPROM Size="4K x 8", LastUpdated="03/12/2019 15:42:55", Lifecycle Status=0, Minimum Order=1, Mounting Type="Surface Mount", Number of I/O=40, Oscillator Type=Internal, Package / Case=48-LQFP, Packaging=Tray, Part Number=LPC11U36FBD48/401,, Part Status=Active, PartId=24, Peripherals="Brown-out Detect/Reset, POR, WDT", Price=5.04, Program Memory Size="96KB (96K x 8)", Program Memory Type=FLASH, RAM Size="10K x 8", Series=LPC11Uxx, Speed=50MHz, Supplier 1=DigiKey
IC5: "TVS DIODE 5.5V SOT143B", Capacitance @ Frequency="1pF @ 1MHz", Device Package="TO-253-4, TO-253AA", Manufacturer="Nexperia USA Inc.", Operating Temperature="-40°C ~ 85°C (TA)", Power Line Protection=Yes, Supplier Device Package=SOT-143B, Supplier Part Number 1=1727-3884-2-ND, Voltage - Breakdown (Min)=6V, Voltage - Reverse Standoff (Typ)="5.5V (Max)", Applications="General Purpose", ComponentLink1Description=Datasheet, ComponentLink1URL=https://assets.nexperia.com/documents/data-sheet/PRTR5V0U2X.pdf, ComponentLink2Description="DigiKey Link", ComponentLink2URL=//digikey.com/product-detail/en/nexperia-usa-inc/PRTR5V0U2X215/1727-3884-2-ND/1163690, LastUpdated="09/12/2019 21:29:05", Lifecycle Status=0, Minimum Order=1, Mounting Type="Surface Mount", Package / Case="TO-253-4, TO-253AA", Packaging=TapeAndReel, Part Number=PRTR5V0U2X,215, Part Status=Active, PartId=5451, Price=0.18, Series=-, Supplier 1=DigiKey, Type="Steering (Rail to Rail)", Unidirectional Channels=2
IC6: "IC SUPERVISOR 1 CHANNEL SOT143-4", Device Package="TO-253-4, TO-253AA", Manufacturer=STMicroelectronics, Number of Voltages Monitored=1, Operating Temperature="-40°C ~ 125°C (TA)", Supplier Device Package=SOT-143-4, Supplier Part Number 1=497-4975-1-ND, Voltage - Threshold=2.93V, ComponentLink1Description=Datasheet, ComponentLink1URL=http://www.st.com/content/ccc/resource/technical/document/datasheet/64/6b/44/43/61/e6/41/d5/CD00081393.pdf/files/CD00081393.pdf/jcr:content/translations/en.CD00081393.pdf, ComponentLink2Description="DigiKey Link", ComponentLink2URL=http://digikey.com/product-detail/en/stmicroelectronics/STM6315SDW13F/497-4975-1-ND/1003446, LastUpdated="21/01/2020 03:59:26", Lifecycle Status=Active, Minimum Order=1, Mounting Type="Surface Mount", Output="Open Drain or Open Collector", Package / Case="TO-253-4, TO-253AA", Packaging=TapeAndReel, Part Number=STM6315SDW13F, Part Status=Active, Price=0.23, Reset="Active Low", Reset Timeout="112ms Minimum", Series=-, Supplier 1=DigiKey, Type="Simple Reset/Power-On Reset"
IC7_LED1 IC7_LED2 IC7_LED3 IC7_LED4: "IC GATE DRVR LOW-SIDE SOT143", Current - Peak Output (Source, Sink)="1.2A, 1.2A", Device Package="TO-253-4, TO-253AA", Logic Voltage - VIL, VIH="0.8V, 2.4V", Manufacturer="Microchip Technology", Operating Temperature="-40°C ~ 150°C (TJ)", Supplier Device Package=SOT-143, Supplier Part Number 1=576-1187-1-ND, Voltage - Supply="4.5V ~ 18V", Channel Type=Single, ComponentLink1Description=Datasheet, ComponentLink1URL=http://www.microchip.com/mymicrochip/filehandler.aspx?ddocname=en579163, ComponentLink2Description="DigiKey Link", ComponentLink2URL=http://digikey.com/product-detail/en/microchip-technology/MIC4416YM4-TR/576-1187-1-ND/771864, Driven Configuration=Low-Side, Gate Type="N-Channel MOSFET", Input Type=Non-Inverting, LastUpdated="31/01/2020 01:32:45", Lifecycle Status=Active, Minimum Order=1, Mounting Type="Surface Mount", Number of Drivers=1, Package / Case="TO-253-4, TO-253AA", Packaging=TapeAndReel, Part Number=MIC4416YM4-TR, Part Status=Active, PartId=7, Price=0.68, Rise / Fall Time (Typ)="14ns, 16ns", Series=IttyBitty®, Supplier 1=DigiKey
IC8_LED1 IC8_LED2 IC8_LED3 IC8_LED4: "MOSFET N-CH 30V U-DFN2020-6", Current - Continuous Drain (Id) @ 25°C="10A (Ta)", Device Package="6-UDFN Exposed Pad", Drain to Source Voltage (Vdss)=30V, Drive Voltage (Max Rds On,  Min Rds On)="4.5V, 10V", Input Capacitance (Ciss) (Max) @ Vds="1415pF @ 15V", Manufacturer="Diodes Incorporated", Operating Temperature="-55°C ~ 150°C (TJ)", Power Dissipation (Max)="730mW (Ta)", Supplier Device Package="U-DFN2020-6 (Type E)", Supplier Part Number 1=DMN3016LFDE-13DICT-ND, ComponentLink1Description=Datasheet, ComponentLink1URL=https://www.diodes.com/assets/Datasheets/DMN3016LFDE.pdf, ComponentLink2Description="DigiKey Link", ComponentLink2URL=http://digikey.com/product-detail/en/diodes-incorporated/DMN3016LFDE-13/DMN3016LFDE-13DICT-ND/8545930, FET Type=N-Channel, Gate Charge (Qg) (Max) @ Vgs="25.1nC @ 10V", LastUpdated="30/03/2020 13:01:59", Lifecycle Status=Active, Minimum Order=1, Mounting Type="Surface Mount", Package / Case="6-UDFN Exposed Pad", Packaging=TapeAndReel, Part Number=DMN3016LFDE-13, Part Status=Active, Price=0.10, Rds On (Max) @ Id, Vgs="12mOhm @ 11A, 10V", Series=-, Supplier 1=DigiKey, Technology="MOSFET (Metal Oxide)", Vgs (Max)=±20V, Vgs(th) (Max) @ Id="2V @ 250µA"
J1: "CONN PWR JACK 1X3.4MM SOLDER", Current Rating (Amps)=3.5A, Manufacturer="CUI Devices", Material Flammability Rating="UL94 V-0", Supplier Part Number 1=CP-075CHPJTR-ND, Voltage - Rated=24VDC, Actual Diameter="0.039\" (1.00mm ID), 0.146\" (3.70mm OD)", ComponentLink1Description=Datasheet, ComponentLink1URL=https://www.cuidevices.com/product/resource/digikeypdf/pj-075ch-smt-tr.pdf, ComponentLink2Description="DigiKey Link", ComponentLink2URL=//digikey.com/product-detail/en/cui-devices/PJ-075CH-SMT-TR/CP-075CHPJTR-ND/3661519, Connector Type=Jack, Features="Board Guide", Gender=Male, Industry Recognized Mating Diameter="1.00mm ID (0.039\"), 3.40mm OD (0.134\")", Internal Switch(s)="Single Switch, Normally Closed", LastUpdated="16/12/2019 19:00:05", Lifecycle Status=0, Mating Length/Depth="0.252\" (6.40mm)", Minimum Order=1, Mounting Type="Surface Mount, Right Angle", Number of Positions/Contacts="2 Conductors, 3 Contacts", Packaging=TapeAndReel, Part Number=PJ-075CH-SMT-TR, Part Status=Active, Price=0.56, Series=-, Shielding=Unshielded, Supplier 1=DigiKey, Termination=Solder
J2: "CONN WIRE POKE-IN 6POS SMD RA", Color=White, Manufacturer="AVX Corporation", Supplier Part Number 1=478-9537-1-ND, Board-Side Pitch="0.118\" (3.00mm)", Cable Pitch="0.118\" (3.00mm)", Cable Termination=Poke-In, ComponentLink1Description=Datasheet, ComponentLink1URL=http://datasheets.avx.com/PHLPHorizontal_00-9296.pdf, ComponentLink2Description="DigiKey Link", ComponentLink2URL=http://digikey.com/product-detail/en/avx-corporation/009296006202906/478-9537-1-ND/5161731, Connector Type="Individual Wires", Contact Finish=Tin, Features="Closed End", LastUpdated="01/05/2020 07:33:23", Lifecycle Status=Active, Minimum Order=1, Mounting Type="Surface Mount, Right Angle", Number of Positions=6, Number of Rows=1, Packaging=TapeAndReel, Part Number=009296006202906, Part Status=Active, Price=0.38, Series=9296, Supplier 1=DigiKey, Wire Gauge="20-26 AWG"
J3: "CONN HEADER SMD 10POS 1.27MM", Current Rating (Amps)=1A, Manufacturer="CNC Tech", Material Flammability Rating="UL94 V-0", Operating Temperature="-40°C ~ 105°C", Supplier Part Number 1=1175-1735-ND, ComponentLink1Description=Datasheet, ComponentLink1URL=http://cnctech.us/idcmatching2.pdf, ComponentLink2Description="DigiKey Link", ComponentLink2URL=http://digikey.com/product-detail/en/cnc-tech/3221-10-0300-00/1175-1735-ND/4878946, Connector Type=Header, Contact Finish - Mating=Gold, Contact Finish - Post=Gold, Contact Finish Thickness - Mating=Flash, Contact Material=Brass, Contact Shape=Square, Contact Type="Male Pin", Fastening Type=Push-Pull, Features="Keying Slot", Insulation Height="0.213\" (5.40mm)", Insulation Material="Polyamide (PA6T), Nylon 6T", LastUpdated="13/01/2020 00:09:21", Lifecycle Status=Active, Minimum Order=1, Mounting Type="Surface Mount", Number of Positions=10, Number of Positions Loaded=All, Number of Rows=2, Packaging=Tray, Part Number=3221-10-0300-00, Part Status=Active, PartId=109, Pitch - Mating="0.050\" (1.27mm)", Price=0.73, Row Spacing - Mating="0.050\" (1.27mm)", Series=-, Shrouding="Shrouded - 4 Wall", Style="Board to Cable/Wire", Supplier 1=DigiKey, Termination=Solder
J4: "CONN RCPT USB2.0 MICRO B SMD R/A", Current Rating (Amps)="1.8A per Contact", Manufacturer="Amphenol ICC (FCI)", Operating Temperature="-30°C ~ 80°C", Supplier Part Number 1=609-4616-2-ND, Voltage - Rated=100VAC, ComponentLink1Description=Datasheet, ComponentLink1URL=https://cdn.amphenol-icc.com/media/wysiwyg/files/documentation/datasheet/inputoutput/io_usb_micro.pdf, ComponentLink2Description="DigiKey Link", ComponentLink2URL=//digikey.com/product-detail/en/amphenol-icc-fci/10118193-0001LF/609-4616-2-ND/2785388, Connector Type="USB - micro B", Features="Solder Retention", Gender=Receptacle, LastUpdated="09/12/2019 20:51:28", Lifecycle Status=0, Mating Cycles=10000, Minimum Order=1, Mounting Feature=Horizontal, Mounting Type="Surface Mount, Right Angle; Through Hole", Number of Contacts=5, Number of Ports=1, Packaging=TapeAndReel, Part Number=10118193-0001LF, Part Status=Active, Price=0.21, Series=-, Shielding=Shielded, Specifications="USB 2.0", Supplier 1=DigiKey, Termination=Solder
R1: library part ERJ-3EKF2402V, "RES SMD 24K OHM 1% 1/10W 0603", Device Package="0603 (1608 Metric)", Manufacturer="Panasonic Electronic Components", Operating Temperature="-55°C ~ 155°C", Power (Watts)="0.1W, 1/10W", Ratings=AEC-Q200, Supplier Device Package=0603, Supplier Part Number 1=P24.0KHCT-ND, Temperature Coefficient=±100ppm/°C, Tolerance=±1%, ComponentLink1Description=Datasheet, ComponentLink1URL=https://industrial.panasonic.com/cdbs/www-data/pdf/RDA0000/AOA0000C304.pdf, ComponentLink2Description="DigiKey Link", ComponentLink2URL=http://digikey.com/product-detail/en/panasonic-electronic-components/ERJ-3EKF2402V/P24.0KHCT-ND/1746748, Composition="Thick Film", Features="Automotive AEC-Q200", Height - Seated (Max)="0.022\" (0.55mm)", LastUpdated="21/01/2020 00:17:12", Lifecycle Status=Active, Minimum Order=1, Number of Terminations=2, Package / Case="0603 (1608 Metric)", Packaging=TapeAndReel, Part Number=ERJ-3EKF2402V, Part Status=Active, PartId=23079, Price=0.01, Resistance="24 kOhms", Series=ERJ, Size / Dimension="0.063\" L x 0.031\" W (1.60mm x 0.80mm)", Supplier 1=DigiKey
R2: library part ERJ-3EKF2001V, "RES SMD 2K OHM 1% 1/10W 0603", Device Package="0603 (1608 Metric)", Manufacturer="Panasonic Electronic Components", Operating Temperature="-55°C ~ 155°C", Power (Watts)="0.1W, 1/10W", Ratings=AEC-Q200, Supplier Device Package=0603, Supplier Part Number 1=P2.00KHCT-ND, Temperature Coefficient=±100ppm/°C, Tolerance=±1%, ComponentLink1Description=Datasheet, ComponentLink1URL=https://industrial.panasonic.com/cdbs/www-data/pdf/RDA0000/AOA0000C304.pdf, ComponentLink2Description="DigiKey Link", ComponentLink2URL=http://digikey.com/product-detail/en/panasonic-electronic-components/ERJ-3EKF2001V/P2.00KHCT-ND/198219, Composition="Thick Film", Features="Automotive AEC-Q200", Height - Seated (Max)="0.022\" (0.55mm)", LastUpdated="21/01/2020 00:14:57", Lifecycle Status=Active, Minimum Order=1, Number of Terminations=2, Package / Case="0603 (1608 Metric)", Packaging=TapeAndReel, Part Number=ERJ-3EKF2001V, Part Status=Active, PartId=25697, Price=0.01, Resistance="2 kOhms", Series=ERJ, Size / Dimension="0.063\" L x 0.031\" W (1.60mm x 0.80mm)", Supplier 1=DigiKey
R3 R9: library part ERJ-PA3J202V, "RES SMD 2K OHM 5% 1/4W 0603", Device Package="0603 (1608 Metric)", Manufacturer="Panasonic Electronic Components", Operating Temperature="-55°C ~ 155°C", Power (Watts)="0.25W, 1/4W", Ratings=AEC-Q200, Supplier Device Package=0603, Supplier Part Number 1=P2KBZCT-ND, Temperature Coefficient=±200ppm/°C, Tolerance=±5%, ComponentLink1Description=Datasheet, ComponentLink1URL=https://industrial.panasonic.com/cdbs/www-data/pdf/RDO0000/AOA0000C331.pdf, ComponentLink2Description="DigiKey Link", ComponentLink2URL=http://digikey.com/product-detail/en/panasonic-electronic-components/ERJ-PA3J202V/P2KBZCT-ND/5036279, Composition="Thick Film", Features="Automotive AEC-Q200, Pulse Withstanding", Height - Seated (Max)="0.022\" (0.55mm)", LastUpdated="21/01/2020 00:23:23", Lifecycle Status=Active, Minimum Order=1, Number of Terminations=2, Package / Case="0603 (1608 Metric)", Packaging=TapeAndReel, Part Number=ERJ-PA3J202V, Part Status=Active, PartId=8961, Price=0.01, Resistance="2 kOhms", Series=ERJ, Size / Dimension="0.063\" L x 0.031\" W (1.60mm x 0.80mm)", Supplier 1=DigiKey
R4 R7: library part ERJ-3EKF1501V, "RES SMD 1.5K OHM 1% 1/10W 0603", Device Package="0603 (1608 Metric)", Manufacturer="Panasonic Electronic Components", Operating Temperature="-55°C ~ 155°C", Power (Watts)="0.1W, 1/10W", Ratings=AEC-Q200, Supplier Device Package=0603, Supplier Part Number 1=P1.50KHCT-ND, Temperature Coefficient=±100ppm/°C, Tolerance=±1%, ComponentLink1Description=Datasheet, ComponentLink1URL=https://industrial.panasonic.com/cdbs/www-data/pdf/RDA0000/AOA0000C304.pdf, ComponentLink2Description="DigiKey Link", ComponentLink2URL=http://digikey.com/product-detail/en/panasonic-electronic-components/ERJ-3EKF1501V/P1.50KHCT-ND/198088, Composition="Thick Film", Features="Automotive AEC-Q200", Height - Seated (Max)="0.022\" (0.55mm)", LastUpdated="21/01/2020 00:24:38", Lifecycle Status=Active, Minimum Order=1, Number of Terminations=2, Package / Case="0603 (1608 Metric)", Packaging=TapeAndReel, Part Number=ERJ-3EKF1501V, Part Status=Active, PartId=5637, Price=0.01, Resistance="1.5 kOhms", Series=ERJ, Size / Dimension="0.063\" L x 0.031\" W (1.60mm x 0.80mm)", Supplier 1=DigiKey
R5 R6: library part ERJ-3EKF33R0V, "RES SMD 33 OHM 1% 1/10W 0603", Device Package="0603 (1608 Metric)", Manufacturer="Panasonic Electronic Components", Operating Temperature="-55°C ~ 155°C", Power (Watts)="0.1W, 1/10W", Ratings=AEC-Q200, Supplier Device Package=0603, Supplier Part Number 1=P33.0HCT-ND, Temperature Coefficient=±100ppm/°C, Tolerance=±1%, ComponentLink1Description=Datasheet, ComponentLink1URL=https://industrial.panasonic.com/cdbs/www-data/pdf/RDA0000/AOA0000C304.pdf, ComponentLink2Description="DigiKey Link", ComponentLink2URL=http://digikey.com/product-detail/en/panasonic-electronic-components/ERJ-3EKF33R0V/P33.0HCT-ND/1746765, Composition="Thick Film", Features="Automotive AEC-Q200", Height - Seated (Max)="0.022\" (0.55mm)", LastUpdated="21/01/2020 00:24:38", Lifecycle Status=Active, Minimum Order=1, Number of Terminations=2, Package / Case="0603 (1608 Metric)", Packaging=TapeAndReel, Part Number=ERJ-3EKF33R0V, Part Status=Active, PartId=5660, Price=0.01, Resistance="33 Ohms", Series=ERJ, Size / Dimension="0.063\" L x 0.031\" W (1.60mm x 0.80mm)", Supplier 1=DigiKey
R8: library part ERJ-3EKF1002V, "RES SMD 10K OHM 1% 1/10W 0603", Device Package="0603 (1608 Metric)", Manufacturer="Panasonic Electronic Components", Operating Temperature="-55°C ~ 155°C", Power (Watts)="0.1W, 1/10W", Ratings=AEC-Q200, Supplier Device Package=0603, Supplier Part Number 1=P10.0KHCT-ND, Temperature Coefficient=±100ppm/°C, Tolerance=±1%, ComponentLink1Description=Datasheet, ComponentLink1URL=https://industrial.panasonic.com/cdbs/www-data/pdf/RDA0000/AOA0000C304.pdf, ComponentLink2Description="DigiKey Link", ComponentLink2URL=http://digikey.com/product-detail/en/panasonic-electronic-components/ERJ-3EKF1002V/P10.0KHCT-ND/198102, Composition="Thick Film", Features="Automotive AEC-Q200", Height - Seated (Max)="0.022\" (0.55mm)", LastUpdated="21/01/2020 00:14:57", Lifecycle Status=Active, Minimum Order=1, Number of Terminations=2, Package / Case="0603 (1608 Metric)", Packaging=TapeAndReel, Part Number=ERJ-3EKF1002V, Part Status=Active, PartId=25695, Price=0.01, Resistance="10 kOhms", Series=ERJ, Size / Dimension="0.063\" L x 0.031\" W (1.60mm x 0.80mm)", Supplier 1=DigiKey
S1 S2: "SWITCH TACTILE SPST-NO 0.05A 24V", Contact Rating @ Voltage="0.05A @ 24VDC", Manufacturer="TE Connectivity ALCOSWITCH Switches", Operating Force=180gf, Operating Temperature="-35°C ~ 85°C", Supplier Part Number 1=450-1758-1-ND, Actuator Height off PCB, Vertical=4.57mm, Actuator Orientation="Top Actuated", Actuator Type=Standard, Circuit=SPST-NO, ComponentLink1Description=Datasheet, ComponentLink1URL=https://www.te.com/commerce/DocumentDelivery/DDEController?Action=srchrtrv&DocNm=1437566-3&DocType=Customer+Drawing&DocLang=English, ComponentLink2Description="DigiKey Link", ComponentLink2URL=http://digikey.com/product-detail/en/te-connectivity-alcoswitch-switches/FSMSMTR/450-1758-1-ND/2271637, Illumination=Non-Illuminated, LastUpdated="25/01/2020 20:03:55", Lifecycle Status=Active, Minimum Order=1, Mounting Type="Surface Mount", Outline="6.00mm x 3.50mm", Packaging=TapeAndReel, Part Number=FSMSMTR, Part Status=Active, Price=0.19, Series=FSMSM, Supplier 1=DigiKey, Switch Function=Off-Mom, Termination Style="Gull Wing"
Y1: library part ABM8G-106-12.000MHZ-T, "IOT 12MHZ 10PF XTAL", Device Package="4-SMD, No Lead", ESR (Equivalent Series Resistance)="120 Ohms", Frequency Stability=±30ppm, Frequency Tolerance=±20ppm, Load Capacitance=10pF, Manufacturer="Abracon LLC", Operating Mode=Fundamental, Operating Temperature="-40°C ~ 85°C", Supplier Part Number 1=535-14512-1-ND, ComponentLink1Description=Datasheet, ComponentLink1URL=https://abracon.com/datasheets/ABM8G-106-12.000MHz-T.pdf, ComponentLink2Description="DigiKey Link", ComponentLink2URL=http://digikey.com/product-detail/en/abracon-llc/ABM8G-106-12.000MHZ-T/535-14512-1-ND/8827203, Frequency=12MHz, Height - Seated (Max)="0.039\" (1.00mm)", LastUpdated="15/01/2020 00:15:56", Lifecycle Status=Active, Minimum Order=1, Mounting Type="Surface Mount", Package / Case="4-SMD, No Lead", Packaging=TapeAndReel, Part Number=ABM8G-106-12.000MHZ-T, Part Status=Active, PartId=308, Price=0.26, Series=ABM8G, Size / Dimension="0.126\" L x 0.098\" W (3.20mm x 2.50mm)", Supplier 1=DigiKey, Type="MHz Crystal"

## Via types
v1: diameter 0.8, hole 0.4, Top Layer to Bottom Layer, 66 vias
v2: diameter 1, hole 0.6, Top Layer to Bottom Layer, 20 vias

## Nets (pads, with @x,y where several pads share a name; then routed paths per layer and width w, separated by ;. In a path a pad name is that pad's centre, name@x,y a point inside that pad or via, vN(x,y) a via of type N, cw(c..) or ccw(c..) an arc to the next point about the centre after c; other vN are vias at no path point)
3V3: C3.2 C4.2 C11.2 FB1.2 FB2.2 IC1.2 IC1.4 IC2.3 IC3.3 IC6.4 J3.1 R1.2 R8.2 | length 103.7
  Top Layer w0.25: IC2.3 4.105,21.98 4.7,22.575 C4.2 ; C4.2@4.8,22.575 5.125,22.9 5.575,22.9 5.75,23.075 12.25,23.075 ; IC1.4 15.05,26.35 15.925,25.475 15.925,23.763 15.237,23.075 12.25,23.075 ; C3.2@18,26.55 18.2,26.35 C3.2 ; C11.2 21.725,16.18 21.575,16.03 21.25,16.03 21.05,15.83 IC6.4 20.435,15.655 19.61,16.48 18.69,16.48 18.415,16.205 R8.2 17.55,16.205 17,16.755 16.99,16.755 16,17.745 16,17.75 14.475,19.275 12.975,19.275 12.25,20 12.25,23.075 ; IC3.3 22.75,31.95 R1.2 v1(22.75,34.5)
  Top Layer w0.4: IC1.4 C3.2@18.2,26.35 ; v1(15,31) IC1.2 ; C3.2@18,26.55 v1(18,27.75) ; J3.1 30.169,19.491 30.169,18.081 30.693,17.557 31.193,17.557 v1(31.25,17.5) ; FB2.2 32.738,1.463 33.713,1.463 v1(33.75,1.5) ; v1(37.5,15) 38.131,14.369 38.131,13.759 FB1.2
  Bottom Layer w0.25: v1(15,31) 18.5,34.5 v1(22.75,34.5)
  Bottom Layer w0.4: v1(15,31) 17.923,28.077 v1@17.923,27.745 ; v1(18,27.75) 18,23.25 21.25,20 23.2,20 25.7,17.5 v1(31.25,17.5) 31.9,17.5 34.4,15 v1(37.5,15) ; v1(33.75,1.5) 33.75,9.05 37.5,12.8 v1@37.5,14.7
5V: D1.2 IC5.4 | length 4.5
  Top Layer w1: IC5.4 29.675,28.475 32.47,31.27 32.75,31.27 D1.2
12V: C1.1 C2.2 C12_LED1.2 C12_LED2.2 C12_LED3.2 C12_LED4.2 C13.2 IC1.3 IC7_LED1.3 IC7_LED2.3 IC7_LED3.3 IC7_LED4.3 J1.1 J2.1 J2.6 | length 35.5
  Top Layer w0.5: IC7_LED4.3 13.32,3.375 13.595,3.65 C12_LED4.2 C13.2@15,2.5 ; IC7_LED3.3 13.32,6.8 13.595,7.075 C12_LED3.2 15.025,7.05 16.225,7.05 v1(16.25,7.025) ; IC7_LED2.3 13.32,10.125 13.595,10.4 C12_LED2.2 15.093,10.307 16.193,10.307 v1(16.25,10.25) ; IC7_LED1.3 13.32,13.55 13.595,13.825 C12_LED1.2 15.05,13.775 16.2,13.775 v1(16.25,13.725)
  Top Layer w2: J1.1 12.4,35.65 C2.2 12.7,35.15 IC1.3
  Bottom Layer w0.5: 15,2.5 15,5.775 ; v1(16.25,7.025) 15,5.775 ; v1(16.25,10.25) 15,9 ; v1(16.25,13.725) 15,12.475 15,9 ; 15,5.775 15,9
  other v2: 8.75,1.25 11.25,1.25 13.75,1.25 1.25,19 3.75,19 6.25,19 8.75,19 11.25,19 5,34.25 6.25,34.25 11.5,35 5,35.75 6.25,35.75 10.5,35.75
GATE_LED1: IC7_LED1.2 IC8_LED1.G | length 1.5
  Top Layer w0.4: IC8_LED1.G 9.4,13.55 IC7_LED1.2
GATE_LED2: IC7_LED2.2 IC8_LED2.G | length 1.5
  Top Layer w0.4: IC8_LED2.G 9.4,10.125 IC7_LED2.2
GATE_LED3: IC7_LED3.2 IC8_LED3.G | length 1.5
  Top Layer w0.4: IC8_LED3.G 9.4,6.8 IC7_LED3.2
GATE_LED4: IC7_LED4.2 IC8_LED4.G | length 1.5
  Top Layer w0.4: IC8_LED4.G 9.4,3.375 IC7_LED4.2
GND: C1.2 C2.1 C3.1 C4.1 C5.1 C6.1 C7.1 C8.1 C9.1 C10.1 C11.1 C12_LED1.1 C12_LED2.1 C12_LED3.1 C12_LED4.1 C13.1 IC1.1 IC2.1 IC4.5 IC4.13 IC4.15 IC4.16 IC4.21 IC4.30 IC4.31 IC4.41 IC5.1 IC6.1 IC7_LED1.1 IC7_LED2.1 IC7_LED3.1 IC7_LED4.1 IC8_LED1.S IC8_LED2.S IC8_LED3.S IC8_LED4.S J1.2 J1.3 J3.2 J3.3 J3.5 J4.5 J4.S R7.1 S1.2 S2.1 Y1.2 Y1.4 | length 360.6
  Top Layer w0.2: S2.1 23.1,11.325 24.75,9.675 ; IC4.30 25.929,9.365 25.06,9.365 24.75,9.675 ; v1(28.75,23.75) cw(c28.146,23.146) 29,23.146 29,21.5 ccw(c29.169,21.331) 28.93,21.331 28.93,18.153 ccw(c29.355,18.153) 29.029,17.879 29.703,17.077 cw(c29.55,16.948) 29.75,16.948 v1(29.75,16.5) ; v1(32.5,9) 32.338,9 32.187,8.85 IC4.31 25.929,8.865 25.135,8.865 24.75,9.25 24.75,9.675